# Altium PCB JadePlus_v0.3.1_board.PcbDoc (part 2 of 3)
Units mm, origin at the board's own origin, x right, y up, seen from the top; angles counter-clockwise.
Board outline 26 x 60.7 mm, 4 copper layers (Top/Sig1, Layer 1, Layer 2, Bottom Layer), stack 0.975 mm thick; 120 components, 82 nets, 471 pads, 1359 vias.
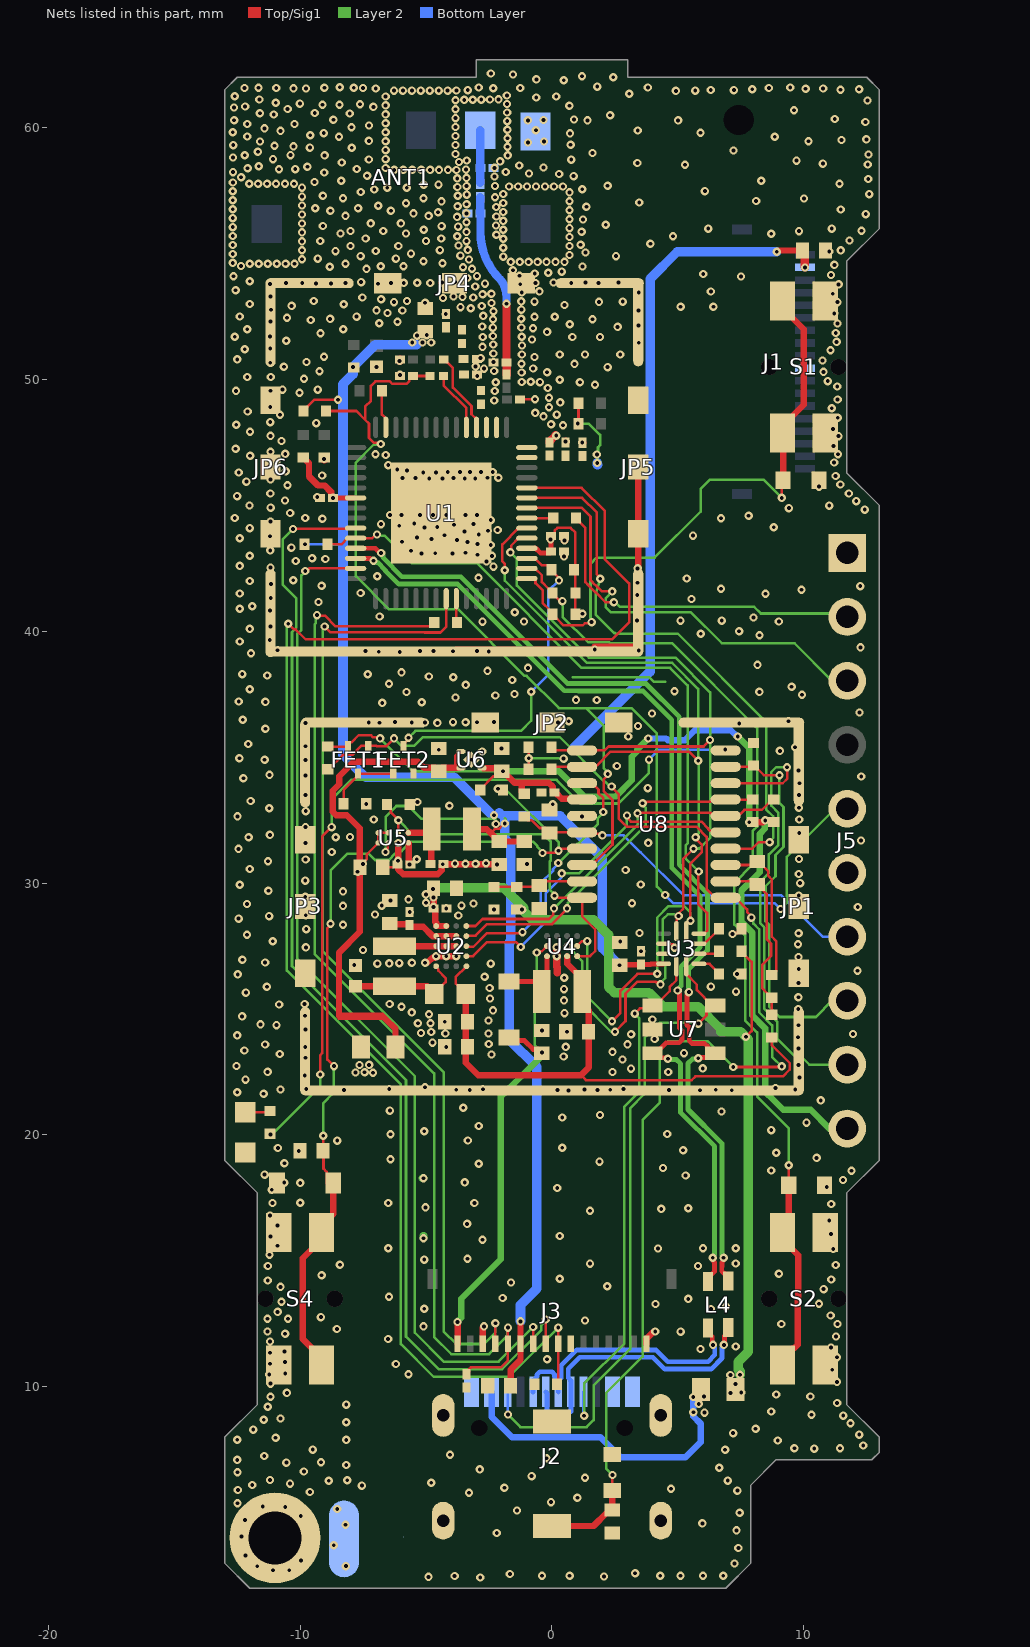
[diagram p4: the nets of this part, all layers, seen from the top]

## Via types
v1: diameter 0.33, hole 0.152, Top/Sig1 to Bottom Layer, tented both sides, 1358 vias
v2: diameter 0.33/0/0/0.33 (per signal layer), hole 0.152, Top/Sig1 to Bottom Layer, tented both sides, 1 vias

## Nets (pads, with @x,y where several pads share a name; then routed paths per layer and width w, separated by ;. In a path a pad name is that pad's centre, name@x,y a point inside that pad or via, vN(x,y) a via of type N, cw(c..) or ccw(c..) an arc to the next point about the centre after c; other vN are vias at no path point) (continued)
GND: ANT1.2 C1.1 C2.1 C3.1 C4.1 C5.2 C6.2 C7.1 C8.2 C9.2 C10.2 C11.2 C12.2 C13.2 C14.1 C15.1 C16.2 C17.1 C18.1 C19.1 C20.2 C21.1 C22.1 C23.1 C24.1 C25.1 C26.1 C27.1 C28.1 C29.1 C30.1 C31.1 C32.1 C33.1 C34.1 C35.1 C37.2 C38.1 C39.2 C41.1 C42.1 C43.1 C44.1 C45.1 D2.2 D4.1 D5.1 D6.1 D7.1 FET2.2 J1.10 J2.GND J2.SHELL J3.1 J3.14 J5.6 JP1.1 JP1.2 JP1.3 JP2.1 JP2.2 JP2.3 JP3.1 JP3.2 JP3.3 JP4.1 JP4.2 JP4.3 JP5.1 JP5.2 JP5.3 JP6.1 JP6.2 JP6.3 pad.0@-8.259,3.961 pad.0@-11,4 pad.36@0,21.775 pad.36@1.899,53.825 pad.36@3.425,40.751 pad.36@3.425,52.274 pad.36@7.518,36.375 pad.36@9.8,23.335 pad.36@9.8,34.815 pad.36@-3.875,39.2 pad.36@-7.468,36.375 pad.36@-9.8,23.335 pad.36@-9.8,34.765 pad.36@-9.624,53.825 pad.36@-11.175,40.726 pad.36@-11.175,52.249 R5.2 R18.2 R19.2 R21.1 R23.1 R27.1 R33.1 R35.2 S1.2 S2.2 S3.2 S4.2 U1.57 U2.D1 U2.D2 U2.D3 U3.10 U3.11 U4.C2 U4.C3 U5.B2 U6.2 U6.5 U7.2 U8.5 | length 39.8
  Top/Sig1 w0.102: C32.1@-6.72,30.625 -6.296,30.625 -6.176,30.745 C33.1@-6.136,30.745 ; C26.1@-6.45,29.31 v1(-6.41,29.31) ; C33.1@-6.136,30.871 v1(-6.117,30.89) ; v1(-5.65,28.85) C25.1@-5.65,28.86 ; R23.1@-5.65,33.125 -5.55,33.225 v1(-5.347,33.225) ; v1(-4.5,35.3) C34.1@-4.5,35.355 ; C29.1@-4.374,30.72 v1(-4.341,30.753) C29.1@-4.301,30.753 ; C23.1@-4.26,23.5 v1(-4.2,23.5) ; v1(-4.2,29) C19.1@-4.19,29 ; U6.2@-2.78,35.225 v1(-2.775,35.23) ; v1(-2,35.35) C38.1@-2,35.355 ; C4.1@-1.267,49.203 -1.254,49.216 v1(-0.677,49.216) ; C31.1@-1.1,30.745 -1.079,30.766 v1(-0.987,30.766) ; C42.1@-0.1,32.91 -0.1,33.007 v1(0.027,33.135) ; C27.1@0.545,24.1 v1(0.6,24.1) ; v1(1.196,32.654) U8.5@1.196,32.671 ; U7.2@3.985,24.196 v1(3.985,24.585) ; U3.10@4.435,27.596 4.45,27.581 4.797,27.581 4.863,27.515 v1(4.863,27.437) ; v1(7.166,27.981) 7.207,28.022 7.376,28.022 7.525,28.171 R18.2@7.525,28.196 ; v1(7.353,26.396) R21.1@7.525,26.396
  Top/Sig1 w0.254: C17.1@-6.975,50.51 v1(-6.965,50.5) ; C33.1@-6.136,30.745 -6.126,30.754 -6.126,30.878 -6.1,30.905 -6.106,30.911 v1(-6.106,31.594) U5.B2@-6.1,31.6 ; v1(-6.117,30.89) C33.1@-6.116,30.889 ; -6.1,30.545 -5.906,30.351 -4.54,30.351 -4.374,30.517 C29.1@-4.374,30.72 ; v1(-5.038,26.842) -5.024,26.857 -4.929,26.857 -4.742,27.044 -4.656,27.044 v1(-4.6,27.1) v1(-4.2,27.1) v1(-3.8,27.1) ; C29.1@-4.301,30.745 C30.1@-2.1,30.745 -2.104,30.741 v1(-2.179,30.741) ; pad.36@-3.875,39.2 -3.81,39.265 1.665,39.265 1.665,39.279 pad.36@1.7,39.315 ; pad.36@-3.832,39.243 v1(3.443,39.243) ; J3.14@-2.75,11.712 -2.75,12.35 v1(-2.7,12.4) ; v1(-2.511,39.197) pad.36@-2.511,39.2 ; C3.1@-2.32,50.675 v1(-2.32,50.695) ; C4.1@-1.27,49.2 C4.1@-1.267,49.203 ; pad.36@1.7,39.2 v1(1.7,39.279) ; v1@1.7,39.4 3.358,39.4 3.425,39.467 3.425,40.371 3.377,40.418 3.425,40.466 JP5.2@3.425,46.525 ; C21.1@2.685,27.651 2.685,27.663 v1(2.707,27.685) ; v1(3.377,40.425) pad.36@3.381,40.422 ; C22.1@3.535,27.296 v1(3.539,27.3) ; J3.1@3.75,11.712 3.75,11.909 4.041,12.2 v1(4.1,12.2)
  Top/Sig1 w0.305: v1(-6.05,50.733) -6.05,50.781 C9.2@-6.037,50.794 ; C5.2@-6.035,50.141 v1(-6.035,50.185) ; C13.2@-0.1,47.5 -0.1,47.54 0.126,47.766 0.166,47.766 v1(0.171,47.771) v1@0.142,47.8 ; v1(0.184,27.455) U4.C3@0.184,27.1 ; U4.C3@0.2,27.1 v1(0.187,27.1) U4.C3@0.184,27.1 ; 0.204,26.445 0.206,26.448 0.206,26.658 0.184,26.681 U4.C3@0.184,27.1 ; C16.2@0.473,43.143 v1(0.473,42.978) v1@0.478,42.978 ; C37.2@0.475,43.795 0.488,43.795 0.495,43.788 0.495,43.618 v1(0.5,43.613) ; C11.2@0.541,47.495 v1(0.541,47.541) ; v1(1.2,47.499) C10.2@1.208,47.49
  Top/Sig1 w0.381: v1(-9.05,46.85) R5.2@-9.05,46.9
  Layer 2 w0.102: 0.818,38.182 1.255,38.182 1.264,38.174 3.865,38.174 4.039,38 4.5,38
  Layer 2 w0.305: v1@-5.145,18.28 v1(-5.1,18.28) ; v1(-5.1,15.9) v1@-5.1,16
  other v1: -2.847,2.43 -4.903,2.453 2.065,2.469 -3.867,2.487 -0.4,2.5 0.7,2.5 4.3,2.5 5.1,2.5 6,2.5 6.8,2.5 -1.673,2.565 3.3,2.6 -11.081,2.719 -10.435,2.715 -11.703,2.877 -8.184,2.88 7.249,2.987 -9.968,3.098 -12.174,3.306 7.4,3.6 -8.667,3.706 -12.329,4.06 -2.192,4.192 7.324,4.299 -8.2,4.525 5.972,4.577 -12.186,4.717 -9.979,4.871 7.45,4.997 -1.392,5.092 -8.525,5.15 -10.594,5.227 -11.486,5.25 -12.491,5.378 -0.039,5.421 1.008,5.592 -3.292,5.792 -9.615,5.826 7.361,5.878 -12.476,5.903 4.725,5.95 -1.892,5.992 -7.55,6.075 -11.9,6.1 -10.405,6.157 -4.792,6.192 -8.863,6.27 -8.128,6.288 6.98,6.274 -11.2,6.3 1.308,6.392 -0.808,6.452 -12.487,6.61 -9.854,6.64 -2.871,6.721 6.642,6.785 -8.172,6.894 -10.548,6.991 -9.175,7.006 -12.5,7.1 -0.218,7.165 -11.429,7.25 -4.05,7.3 -9.503,7.506 6.876,7.499 9.626,7.563 10.412,7.546 11.437,7.561 12.358,7.669 8.964,7.865 -8.172,7.894 -12.5,7.9 -10.975,7.978 12.2,8.1 7.194,8.161 -11.865,8.299 8.088,8.334 11.853,8.551 -8.172,8.594 -11.448,8.693 -10.784,8.745 11.563,8.856 10.308,8.892 8.706,9.019 -11.285,9.21 -8.172,9.294 11.323,9.36 -11.177,9.609 10.261,9.617 8.908,9.692 -10.529,9.759 -11.18,10.127 11.314,10.198 -11.225,10.487 -5.7,10.5 -10.59,10.529 11.127,10.676 -11.201,10.917 -6.2,10.907 -10.605,10.987 -0.192,11.092 11.32,11.174 -11.199,11.356 -10.628,11.402 5.9,11.5 11.077,11.564 7.3,11.6 -11.2,11.8 -6.508,11.902 11.279,12.001 -10.596,12.109 -11.3,12.2 5.108,12.192 -8.543,12.298 -5.1,12.4 9.108,12.492 11.338,12.493 1.307,12.632 -11.3,12.7 -10.48,12.701 -9.179,12.768 11.065,12.836 -10.895,12.977 -5.071,13.1 6.308,13.092 6.908,13.192 4.108,13.292 10.6,13.3 -10.745,13.376 5.408,13.492 -1.96,13.526 -6.472,13.575 10.787,13.879 -10.783,13.968 2.191,13.994 -1.63,14.141 -11.289,14.219 11.091,14.26 0.308,14.292 -9.149,14.429 9.008,14.492 -11.282,14.796 5.8,14.8 -8.424,14.848 11.271,14.839 1.508,14.892 7.3,14.9 -5.075,15.05 -3.355,15.086 -11.222,15.246 11.167,15.473 -6.5,15.5 4.208,15.492 6,15.5 7.3,15.5 -10.9,15.6 -2.761,15.84 -11.18,15.969 0.308,15.992 11.078,16.074 -10.9,16.4 -3.371,16.471 11.008,16.61 -11.2,16.8 1.508,16.992 4.34,17.068 5.408,17.092 -5.025,17.125 11.087,17.258 -11.1,17.3 -9.995,17.31 -6.5,17.3 -3.081,17.303 -11.13,17.828 0.208,17.892 10.914,17.939 -10,18.1 -10.633,18.108 -3.464,18.119 11.557,18.211 5.308,18.392 -11.413,18.425 11.895,18.582 8.708,18.592 4.408,18.692 -2.911,18.858 -10.628,18.881 1.883,18.942 -6.413,19.036 10.508,19.092 8.908,19.292 -10.055,19.37 5.208,19.392 -10.885,19.482 0.408,19.492 -8.53,19.777 -3.34,19.783 -6.412,20.032 4.576,20.037 -5.075,20.15 8.708,20.192 -2.906,20.357 10.108,20.492 0.408,20.692 1.908,20.792 6.731,20.934 -6.438,20.966 -3.526,21.08 10.675,21.375 -11.452,21.638 -12.5,21.7 -8.259,21.788 -3.268,21.785 0.217,21.783 0.657,21.77 1.81,21.79 4.647,21.783 5.871,21.777 7.141,21.777 -10.784,21.804 -3.8,21.8 -2.745,21.814 1.284,21.806 2.313,21.796 6.5,21.8 9.657,21.807 -9.758,21.83 -6.461,21.824 2.835,21.822 8.872,21.864 -5.043,21.895 -12.169,22.198 9.823,22.281 -9.82,22.369 2.4,22.5 -11.292,22.508 4.62,22.503 3.137,22.637 5.989,22.647 -12.528,22.738 9.788,22.774 2.8,23 -9.784,23.065 0.463,23.114 -2.4,23.2 -10.813,23.217 5.241,23.252 2.4,23.3 -12.216,23.357 9.784,23.43 -9.8,23.497 0.543,23.499 -11.393,23.595 -2.512,23.616 3,23.6 -4.743,23.667 4.075,23.811 9.766,23.88 -12.498,23.956 3.143,24 11.956,24.007 -5.204,24.049 -4.234,24.03 -2.519,24.031 -4.797,24.092 -0.4,24.155 -9.791,24.195 9.794,24.355 -10.937,24.364 -11.576,24.393 -5.326,24.441 -4.822,24.436 -4.26,24.5 -2.519,24.546 -12.304,24.711 -9.807,24.738 -4.883,24.797 0.5,24.841 -5.568,24.871 -2.343,24.95 9.778,25.004 -5.973,25.095 -10.837,25.186 -9.823,25.199 -6.446,25.206 0.477,25.345 -2.461,25.424 9.784,25.469 -12.155,25.654 7.308,25.692 0.477,25.792 -2.475,25.839 -11.322,25.889 6.308,25.892 9.788,26.041 0.486,26.246 -2.674,26.284 -12.48,26.38 12.131,26.523 9.798,26.586 -7.852,26.755 -6.934,26.804 -6.462,26.817 -2.435,26.805 -6.066,26.824 -5.564,26.837 -11.393,26.853 -12.297,26.961 9.791,27.071 -7.505,27.345 -9.775,27.45 9.767,27.573 -11.091,27.692 -12.115,27.951 3.475,28.025 9.794,28.015 -9.758,28.175 -8.3,28.35 -12.445,28.591 -11.233,28.691 -3.718,28.719 -9.778,28.727 -7.028,28.758 -2.3,28.95 12.145,29.052 -8.3,29.1 -6.762,29.107 -3.597,29.108 -12.108,29.171 -3.117,29.193 3.175,29.2 -5.697,29.358 -9.801,29.462 9.801,29.513 -8.3,29.675 -11.263,29.696 -12.398,29.939 3.525,29.95 9.854,30.002 -9.796,30.103 9.801,30.366 2.925,30.525 -12,30.565 -3.855,30.775 -3.438,30.774 -3.033,30.772 -2.619,30.79 -11.274,30.873 -9.783,30.944 9.808,30.959 -8.748,31.241 -12.451,31.363 -9.786,31.593 3.825,31.6 12.271,31.693 -12.048,31.825 -8.589,31.824 -8.024,31.832 -11.203,31.919 9.821,31.996 -9.79,32.226 -7.081,32.528 9.821,32.531 -12.486,32.652 -9.778,32.862 -11.227,32.977 9.804,32.996 -4.075,33.075 -7.375,33.15 -11.967,33.26 -9.791,33.495 9.811,33.504 3.8,33.775 9.831,33.969 -12.256,34.169 12.278,34.237 -9.791,34.274 -11.215,34.302 9.794,34.481 2.575,34.65 -9.788,34.887 -11.41,34.899 -3.2,34.9 -12.415,34.964 9.049,35.255 9.655,35.398 -9.788,35.441 -12.061,35.53 3.025,35.825 -11.381,36.134 3.412,36.242 7.437,36.341 -9.794,36.36 -6.849,36.369 -4.552,36.365 -7.277,36.387 -5.568,36.382 -5.047,36.378 -3.43,36.391 -2.98,36.391 0.24,36.378 -6.239,36.4 -3.929,36.396 -2.299,36.4 0.664,36.431 9.392,36.428 -12.283,36.487 3.97,36.741 12.208,36.78 -6.744,37.16 -11.381,37.198 -5.172,37.184 -12.439,37.216 0.95,37.281 1.775,37.272 -3.83,37.376 -2.248,37.452 9.929,37.485 -1.486,37.514 -5.776,37.591 8.233,37.596 4.863,37.621 -12,37.7 9.516,37.798 -3.427,37.874 -6.475,37.922 -1.578,38.07 -3.921,38.181 -4.889,38.209 -11.31,38.245 -12.3,38.3 -7.314,38.296 -5.977,38.372 -2.565,38.43 -0.95,38.55 8.16,38.668 -11.954,39.127 -6.043,39.186 -6.88,39.192 -3.936,39.21 -7.412,39.216 -5.237,39.223 -4.708,39.216 -2.972,39.221 -10.896,39.25 12.25,39.365 -12.4,39.6 -11.209,39.662 8.239,39.845 5.909,39.905 7.43,40.002 -12,40.1 -11.181,40.199 -2.763,40.387 -1.112,40.388 9.008,40.392 5.1,40.425 6.74,40.425 8.003,40.549 -6.846,40.592 -1.482,40.758 -11.199,40.825 -12.4,40.9 -11.9,41 -9.271,41.168 5.538,41.286 -11.167,41.328 3.389,41.447 -12.4,41.5 8.482,41.493 -7.6,41.525 9.905,41.653 6.708,41.692 12.243,41.796 -9.147,41.808 -11.162,41.886 3.395,41.93 -12,42 -10.273,42.028 5.35,42.1 -2.918,42.131 -6.941,42.188 3.4,42.5 -11.178,42.53 -2.324,42.571 -12.4,42.6 -10.173,42.794 -2.602,42.776 -9,42.875 -9.525,42.9 -2.385,42.999 -12,43 -2.956,43.04 -5.184,43.098 -3.957,43.093 -4.635,43.104 -3.441,43.12 -5.598,43.199 -11.188,43.215 -10.35,43.325 -2.429,43.429 -2.959,43.47 -3.353,43.553 -5.958,43.559 -3.766,43.625 -4.784,43.666 -12.4,43.7 -5.357,43.732 -11.196,43.776 5.6,43.8 -4.263,43.815 -2.909,43.842 -3.48,43.967 -2.548,43.994 -2.159,44.022 -12,44.1 -5.059,44.129 8.804,44.136 -4.558,44.146 -6.063,44.193 -3.893,44.234 -6.791,44.259 -3.121,44.264 -5.473,44.284 -11.181,44.362 -2.432,44.416 -9.119,44.47 6.708,44.492 -12.6,44.5 -9.8,44.5 7.808,44.592 -6.432,44.62 -5.978,44.62 -5.244,44.62 -4.723,44.62 -4.196,44.62 -3.438,44.62 -2.978,44.62 -10.4,44.7 12.42,44.834 9.408,44.892 -11.173,44.912 -12.01,45.001 11.008,44.992 12.082,45.172 -10.6,45.2 -9.32,45.338 -12.505,45.369 -11.183,45.473 11.789,45.477 10.603,45.746 -10.5,45.8 11.45,45.83 -12.137,45.945 -11.178,46.031 -4.876,46.068 -4.354,46.068 -3.466,46.068 -3.046,46.068 -5.932,46.091 -5.415,46.089 -3.906,46.085 -2.56,46.099 -2.129,46.099 11.262,46.168 -9.129,46.186 -12.44,46.31 -5.111,46.312 -4.605,46.305 -4.142,46.328 -3.657,46.328 -3.26,46.328 -2.821,46.328 -2.354,46.328 -10.574,46.357 -5.763,46.389 -6.148,46.434 -11.188,46.555 -6.5,46.6 11.203,46.703 -11.988,46.976 -6.6,47 -7.007,47.035 11.357,47.035 -10.59,47.048 -11.181,47.133 -12.564,47.248 11.176,47.366 -10.741,47.559 -11.181,47.764 11.377,47.751 -11.991,47.93 11.157,48.034 -12.536,48.202 0.44,48.182 -0.035,48.225 -9.363,48.268 -11.186,48.309 11.349,48.483 -0.337,48.537 -10.8,48.6 0.186,48.606 -0.668,48.676 -12.087,48.728 11.11,48.863 -11.19,48.907 -0.122,48.9 0.327,49.092 -2.292,49.17 11.344,49.21 -0.121,49.278 -10.025,49.475 -12.552,49.549 -2.274,49.541 -11.181,49.557 -10.7,49.6 -9.3,49.6 -0.166,49.664 11.33,49.721 1.708,49.792 -2.235,49.894 -1.201,49.903 -0.481,49.896 1.108,49.892 -0.847,49.914 10.953,49.936 0.308,49.992 -9.848,50.031 -12.1,50.1 -11.167,50.1 -2.971,50.145 -1.207,50.279 -0.192,50.292 10.78,50.304 -9.234,50.332 -2.298,50.337 -2.704,50.433 -0.75,50.435 2.208,50.492 -10.648,50.504 -3.033,50.522 -1.209,50.628 0.895,50.622 -11.187,50.669 -9.749,50.693 10.744,50.758 -12.5,50.8 -2.833,50.848 -0.692,50.892 -9.055,50.904 -1.196,50.993 0.308,50.992 1.308,50.992 2.708,50.992 -2.327,51.035 11.062,51.16 -12.2,51.2 -11.187,51.234 -2.763,51.296 -1.188,51.355 -2.335,51.391 3.442,51.459 11.304,51.497 -10.553,51.538 -0.792,51.592 -12.6,51.7 -11.192,51.71 -2.752,51.692 -1.2,51.7 0.808,51.692 1.908,51.692 -2.348,51.73 -9.195,51.837 11.269,51.851 -0.192,51.892 -12.1,52 -8.288,51.995 -0.753,52.039 -2.347,52.06 -1.215,52.063 2.608,52.092 -2.772,52.108 3.438,52.141 0.708,52.192 -6.857,52.233 11.34,52.223 -6.132,52.295 -11.181,52.301 -9.583,52.367 -2.341,52.392 1.608,52.392 -8.811,52.409 -1.219,52.411 -10.525,52.452 -7.759,52.498 -0.692,52.492 0.108,52.492 -12.4,52.5 -2.729,52.527 -4.217,52.598 -6.532,52.642 11.211,52.629 -2.327,52.714 -6.967,52.747 -5.942,52.739 3.429,52.739 -11.156,52.77 -1.217,52.777 -3.228,52.831 -3.636,52.875 5.108,52.892 6.408,52.892 -10.338,52.925 -2.786,52.92 0.496,52.959 -12,53 -8.271,52.992 -5.038,53.048 -2.4,53.041 -6.275,53.075 11.334,53.073 -1.223,53.103 -0.692,53.092 1.864,53.083 2.808,53.092 -9.463,53.119 -5.759,53.118 -6.787,53.186 -4.326,53.235 -7.531,53.26 -3.128,53.257 -3.555,53.281 -11.176,53.302 -3.908,53.296 -2.755,53.385 -2.407,53.407 11.146,53.405 -1.2,53.454 3.442,53.452 -0.5,53.5 6.308,53.492 -12.563,53.548 -3.046,53.697 -1.264,53.783 11.382,53.779 -11.2,53.8 -9.375,53.817 -6.91,53.803 -2.658,53.809 -10.559,53.834 -9.915,53.831 -8.77,53.82 -8.201,53.84 -6.395,53.837 -5.886,53.84 -4.833,53.834 -0.654,53.832 0.761,53.832 1.842,53.832 -7.58,53.868 -5.354,53.845 -4.355,53.848 0.057,53.85 1.325,53.853 2.64,53.85 -3.857,53.873 -12,53.9 -3.37,54.029 7.508,54.092 -12.65,54.1 -2.975,54.105 -1.294,54.121 11.077,54.153 6.008,54.192 -0.684,54.209 -0.148,54.238 0.39,54.286 -1.555,54.342 -7.369,54.393 -3.177,54.399 -8.824,54.479 -3.532,54.457 -12.35,54.505 -6.8,54.5 -5.9,54.5 1.208,54.492 11.213,54.554 -12,54.597 -11.644,54.597 -11.289,54.597 -10.933,54.597 -10.578,54.597 -10.223,54.597 -8.2,54.6 -12.675,54.632 -4.347,54.621 -1.637,54.674 -1.282,54.674 -0.927,54.674 -0.571,54.674 -0.216,54.674 0.14,54.674 0.495,54.674 -5.1,54.7 -9.929,54.776 -3.297,54.768 -9.3,54.8 -6.2,54.8 -1.935,54.879 -7.6,54.9 2.54,54.899 -3.639,54.922 0.693,54.946 -12.675,54.987 -5.6,55 1.332,55.046 11.011,55.085 -8.6,55.1 -7,55.107 -9.929,55.132 -4.452,55.137 11.465,55.129 -3.348,55.149 -1.935,55.235 -8,55.3 -6.1,55.3 0.693,55.301 -12.675,55.342 -3.714,55.326 1.138,55.355 3.908,55.392 -9.929,55.487 -9.2,55.5 -5,55.5 -3.393,55.496 11.816,55.519 -1.935,55.59 -7.4,55.6 -4.4,55.6 0.693,55.657 -12.675,55.698 -3.763,55.687 4.808,55.692 -2.21,55.747 -8.4,55.8 -5.8,55.8 8.708,55.792 -9.929,55.843 -3.397,55.864 1.178,55.868 -8,55.9 -6.7,55.9 9.808,55.892 12.293,55.909 -5.095,55.948 -1.935,55.945 6.208,55.992 11.108,55.992 0.693,56.012 -12.675,56.053 -3.728,56.072 -9.1,56.1 -4.384,56.091 -2.225,56.12 2.135,56.144 -9.929,56.198 -7.2,56.2 -6,56.2 -3.393,56.249 -1.935,56.301 1.233,56.355 0.693,56.368 -12.675,56.409 -3.766,56.46 -2.208,56.474 -8.2,56.5 -4.9,56.5 -9.929,56.553 12.459,56.567 -5.5,56.6 -3.4,56.6 -4.521,56.644 -1.935,56.656 -8.8,56.7 -6.4,56.7 0.693,56.723 -12.675,56.764 11.466,56.752 -9.4,56.8 -7.7,56.8 -2.216,56.849 1.365,56.863 -3.748,56.882 -9.929,56.909 -6.9,56.9 -3.389,56.963 -5.8,57 -1.935,57.012 3.462,57.029 -4.389,57.077 0.693,57.078 8.108,57.092 -12.675,57.12 10.008,57.192 -8.3,57.2 -5.1,57.2 -2.265,57.237 -9.929,57.264 -9.1,57.3 -3.742,57.3 -3.387,57.343 -1.935,57.367 12.596,57.362 -7.593,57.445 0.693,57.434 -12.675,57.475 6.072,57.481 -7.061,57.546 1.203,57.556 -9.929,57.62 -6.539,57.614 -5.77,57.614 -3.757,57.642 -3.389,57.679 -1.702,57.665 -1.346,57.665 -0.991,57.665 -0.635,57.665 -0.28,57.665 0.075,57.665 0.431,57.665 -2.263,57.688 2.208,57.692 -5.095,57.735 -4.505,57.74 -12.024,57.773 -11.669,57.773 -11.313,57.773 -10.958,57.773 -10.602,57.773 -10.247,57.773 11.42,57.776 -12.672,57.827 -9.428,57.843 -8.366,57.892 8.308,57.892 12.562,57.962 -3.761,57.988 -3.397,58.009 -12.343,58.034 -2.28,58.066 0.858,58.077 -7.34,58.094 0.284,58.163 -0.912,58.181 -12.667,58.236 -9.043,58.219 -1.835,58.242 -6.263,58.325 -5.907,58.325 -5.552,58.325 -5.196,58.325 -4.841,58.325 -4.485,58.325 -4.13,58.325 -3.799,58.318 -3.412,58.339 -10.842,58.352 -10.195,58.355 -7.754,58.358 -12.088,58.39 -6.605,58.398 -2.281,58.405 -0.334,58.418 -9.716,58.452 -11.645,58.468 -1.3,58.5 5.279,58.532 12.537,58.537 10.755,58.572 -8.347,58.617 3.389,58.596 -3.695,58.639 -2.06,58.664 9.708,58.692 -3.385,58.697 -7.272,58.737 0.764,58.732 -11.078,58.753 -6.605,58.754 -12.668,58.817 -12.198,58.905 -10.386,58.911 -9.03,58.902 -1.759,58.901 12.566,58.937 -3.829,58.958 1.608,58.992 -11.68,59.044 7.208,59.092 -6.605,59.109 -9.615,59.209 -7.952,59.206 -1.764,59.242 -10.263,59.258 -11.017,59.287 -12.656,59.309 -3.829,59.314 0.74,59.322 -0.955,59.416 -11.596,59.452 -0.32,59.456 -7.272,59.478 -6.605,59.464 10.183,59.462 11.494,59.509 12.484,59.536 -1.768,59.582 -12.104,59.653 -8.457,59.64 8.847,59.638 -3.829,59.669 -9.6,59.7 -9.065,59.785 0.715,59.775 5.9,59.8 -12.677,59.817 -6.605,59.82 -10.78,59.876 -0.639,59.897 3.408,59.892 -1.773,59.922 -11.415,59.973 -7.962,60.018 -3.829,60.025 -7.269,60.089 -12.101,60.145 -10.224,60.151 -6.605,60.175 12.445,60.224 -1.777,60.262 -12.624,60.295 -0.959,60.292 1.408,60.292 5.008,60.292 -8.683,60.319 -0.334,60.303 0.876,60.326 11.226,60.348 -3.829,60.38 2.308,60.492 -11.049,60.523 -6.605,60.531 -11.599,60.575 -8.033,60.562 -9.424,60.585 -1.782,60.602 9.608,60.692 -10.499,60.743 -3.829,60.736 -12.625,60.8 -7.094,60.827 -12.185,60.84 0.691,60.872 -6.605,60.886 -9.117,60.912 -8.437,60.912 -7.625,60.931 -10.013,60.957 -1.786,60.942 -10.968,60.989 12.528,61.082 -3.829,61.091 -3.487,61.106 -11.622,61.122 -3.147,61.111 -2.807,61.115 -2.467,61.12 -2.126,61.125 -0.625,61.199 -12.598,61.251 -6.605,61.242 0.169,61.238 -1.791,61.282 3.065,61.35 4.918,61.462 -6.276,61.472 -5.921,61.472 -5.566,61.472 -5.21,61.472 -4.855,61.472 -4.499,61.472 -4.144,61.472 -3.796,61.476 5.688,61.472 -3.344,61.493 6.307,61.496 7.223,61.491 11.455,61.511 7.955,61.53 12.196,61.525 -10.268,61.563 -9.767,61.56 -6.999,61.557 10.07,61.55 10.768,61.554 -12.21,61.578 -11.653,61.587 -10.953,61.575 -9.041,61.587 -7.874,61.587 -7.504,61.575 -2.334,61.569 -1.259,61.574 8.613,61.579 -8.428,61.61 -2.908,61.595 3.806,61.593 9.461,61.593 1.798,61.632 0.467,61.886 -0.62,61.92 2.431,62.003 1.188,62.047 -1.551,62.116 -2.426,62.152
GPIO0: C5.1 J5.5 L5.1 R12.1 U8.8 | length 51.5
  Top/Sig1 w0.102: R12.1@-8.975,48.75 -7.765,48.75 -7.418,48.403 ; v1(-6.8,47.438) -6.844,47.482 -7.064,47.482 -7.268,47.686 -7.268,48.253 -7.418,48.403 ; L5.1@-4.847,50.142 L5.1@-4.847,50.142 C5.1@-5.515,50.141 -5.555,50.141 -5.664,50.032 -5.664,49.936 -5.772,49.828 -6.343,49.828 -6.442,49.927 -7.013,49.927 -7.196,49.745 -7.196,49.153 -7.418,48.932 -7.418,48.403 ; U8.8@1.196,30.721 1.596,30.721 2.403,31.528 2.403,33.299 2.05,33.652 2.05,34.114 2.216,34.279 v1(2.216,34.341)
  Layer 2 w0.102: v1(-6.8,47.438) -6.827,47.411 -7.08,47.411 -7.791,46.7 -7.791,42.191 -6.47,40.87 -3.72,40.87 -1.083,38.232 -1.008,38.232 0.27,36.954 1.35,36.954 ; v1(2.216,34.341) 2.216,34.403 2.05,34.568 2.05,36.254 1.35,36.954 ; v1(4.495,29.534) 4.167,29.862 4.167,35.935 3.149,36.954 1.35,36.954 ; v1(9.075,28.975) 9.324,29.224 9.324,31.049 11.23,32.955 J5.5@11.475,32.955
  Bottom Layer w0.102: v1(4.495,29.534) 4.829,29.2 8.85,29.2 v1(9.075,28.975)
LCD_CS: J3.10 U1.27 | length 40.8
  Top/Sig1 w0.102: v1(-9.8,42.4) -9.738,42.4 -9.638,42.5 U1.27@-7.8,42.5 ; J3.10@-0.75,11.712 v1(-0.75,12.375)
  Layer 2 w0.102: v1(-9.8,42.4) -9.8,42.382 -9.956,42.226 -9.956,40.054 -10.123,39.888 -10.123,27.008 -5.45,22.335 -5.45,12.15 -4.3,11 -2.125,11 v1(-0.75,12.375)
LCD_DC: J3.13 U1.36 | length 39.8
  Top/Sig1 w0.102: v1(-9.029,40.191) -8.798,39.96 -5.06,39.96 -5.054,39.954 -4.43,39.954 -4.197,40.187 U1.36@-4.197,41.297 ; J3.13@-2.25,11.712 v1(-2.25,12.525)
  Layer 2 w0.102: v1(-9.029,40.191) -9.029,40.129 -9.11,40.048 -9.11,34.152 -9.11,27.31 -4.3,22.5 -4.3,12.2 -3.8,11.7 -2.7,11.7 -2.25,12.15 v1(-2.25,12.525)
LCD_RST: J3.8 R33.2 U1.52 | length 62.7
  Top/Sig1 w0.102: v1(-10.476,40.3) -10.472,40.3 -10.25,40.078 -10.178,40.078 -9.779,39.679 2.379,39.679 3.059,40.359 3.059,41.902 2.1,42.861 2.1,44.775 1.175,45.7 U1.52@-1,45.7 ; R33.2@0.2,10.1 0.25,10.15 J3.8@0.25,11.712 v1(0.25,12.35)
  Layer 2 w0.102: v1(-10.476,40.3) -10.52,40.256 -10.52,40.165 -10.529,40.156 -10.529,26.529 -6,22 -6,11.7 -4.7,10.4 -1.7,10.4 v1(0.25,12.35)
LCD_SCK: C39.1 J3.12 R24.1 | length 42.7
  Top/Sig1 w0.102: v1(-9.332,40.645) -9.311,40.625 -9.014,40.625 -8.589,40.2 -4.675,40.2 R24.1@-4.675,40.35 ; C39.1@-3.4,10.5 -3.291,10.609 -3.291,10.7 -3.216,10.775 -2.025,10.775 -1.75,11.05 J3.12@-1.75,11.712 v1(-1.75,12.35)
  Layer 2 w0.102: v1(-9.332,40.645) -9.375,40.601 -9.375,40.331 -9.429,40.277 -9.429,27.188 -4.683,22.442 -4.683,11.983 -4,11.3 -2.5,11.3 -1.768,12.032 -1.768,12.332 v1(-1.75,12.35)
LCD_TE: J3.7
MCU_NRST: C42.2 J5.7 R29.2 U8.6 | length 14.6
  Top/Sig1 w0.102: R29.2@-1.1,32.65 -0.956,32.506 -0.807,32.506 -0.492,32.191 -0.27,32.191 -0.1,32.021 U8.6@1.196,32.021 1.253,31.964 1.936,31.964 v1(2,31.9)
  Bottom Layer w0.102: v1(2,31.9) 2.841,31.9 3.516,31.225 3.525,31.225 5.225,29.525 9.099,29.525 10.749,27.875 J5.7@11.475,27.875
NetANT1_1: ANT1.1 C1.2 R1.1 | length 2
  Bottom Layer w0.33: R1.1@-2.85,57.81 C1.2@-2.85,58.328 ; ANT1.1@-2.85,59.9 -2.845,59.895 C1.2@-2.845,58.4
NetC2_2: C2.2 C3.2 R1.2 R2.1 | length 7.3
  Top/Sig1 w0.33: v2(-1.809,53.012) -1.809,50.68 -1.804,50.675 C3.2@-1.8,50.675 R2.1@-1.8,50.195
  Bottom Layer w0.33: C2.2@-2.851,56.611 R1.2@-2.851,57.239 ; C2.2@-2.84,56.6 -2.84,55.835 ccw(c-0.249,55.835) -2.081,54.003 cw(c-2.66,53.424) -1.904,53.737 cw(c-3.054,53.261) -1.809,53.262 -1.809,53.26 v2(-1.809,53.012)
NetC20_1: C20.1 L1.2 R22.2 U2.E1 | length 4.7
  Top/Sig1 w0.102: R22.2@-4.675,25.625 -4.225,26.075 -4.225,26.233 -4.516,26.524 -4.516,26.582 -4.6,26.665 U2.E1@-4.6,26.7
  Top/Sig1 w0.254: C20.1@-7.8,25.9 L1.2@-6.25,25.9 -4.95,25.9 -4.675,25.625 R22.2@-4.675,25.6
NetC25_2: C25.2 C26.2 U2.B1 U2.B2 U2.B3 | length 2.9
  Top/Sig1 w0.254: C26.2@-6.45,28.4 -6.42,28.37 -5.68,28.37 C25.2@-5.65,28.34 -5.65,28.3 -5.617,28.267 -5.109,28.267 -4.742,27.9 U2.B1@-4.6,27.9 U2.B2@-4.2,27.9 U2.B3@-3.8,27.9
NetC29_2: C29.2 L3.2 U5.A1 | length 2.4
  Top/Sig1 w0.254: U5.A1@-5.7,32 -4.92,32 L3.2@-4.798,32.122 ; C29.2@-4.821,30.753 -4.798,30.776 L3.2@-4.798,32.122 ; L3.2@-4.775,32.146 L3.2@-4.798,32.122
NetD1_1: D1.1 L2.2 U4.D3 | length 3
  Top/Sig1 w0.203: D1.1@-1.7,26.1 -0.648,26.1 -0.4,25.852 L2.2@-0.4,25.7 -0.2,25.9 U4.D3@-0.2,27.1
NetD2_1: D2.1 R28.1 | length 1
  Top/Sig1 w0.102: D2.1@-12.179,20.905 -11.245,20.905 R28.1@-11.2,20.95
NetFB2_2: FB2.2 J2.VBUS | length 12.1
  Bottom Layer w0.254: J2.VBUS@-2.4,9.8 -2.4,8.813 -1.586,8 1.926,8 2.726,7.2 5.3,7.2 5.9,7.8 5.9,8.544 5.612,8.832 v1(5.612,9.597)
  other v1: 5.615,8.989 6.056,8.974 5.828,9.322 6.036,9.609
NetFET1_3: FET1.3 FET2.1 R19.1 | length 2.8
  Top/Sig1 w0.102: R19.1@-8.275,33.15 -8.275,33.7 -7.7,34.275 FET1.3@-7.7,34.35 FET2.1@-6.3,34.35
NetL1_1: L1.1 U2.C1 U2.C2 U2.C3 | length 2.5
  Top/Sig1 w0.254: L1.1@-6.25,27.5 U2.C1@-4.6,27.5 U2.C2@-4.2,27.5 U2.C3@-3.8,27.5
NetL5_2: L5.2 U1.5 | length 2.4
  Top/Sig1 w0.102: L5.2@-4.307,50.142 -4.307,49.769 -3.4,48.862 U1.5@-3.4,48.1
NetL6_1: L6.1 U1.4 | length 3.3
  Top/Sig1 w0.102: L6.1@-4.3,50.8 -4.191,50.691 -4.161,50.691 -3.932,50.463 -3.932,49.682 -3.197,48.946 -3.197,48.622 -3,48.425 U1.4@-3,48.1
NetL7_1: L7.1 U1.2 U1.3
NetR3_2: R3.2 U1.13 | length 1.5
  Top/Sig1 w0.102: R3.2@-6.75,49.55 -6.752,49.548 -6.752,48.604 -6.6,48.452 U1.13@-6.6,48.1
NetR6_2: R6.2 U1.49 | length 1.1
  Top/Sig1 w0.102: U1.49@-1,44.5 R6.2@0.05,44.5
NetR16_2: R16.2 U3.4 | length 0.8
  Top/Sig1 w0.102: U3.4@5.835,27.196 6.535,27.196 R16.2@6.635,27.296
NetR18_1: R18.1 U3.5 | length 1.1
  Top/Sig1 w0.102: U3.5@5.835,27.596 6.06,27.596 6.635,28.171 R18.1@6.635,28.196
NetR21_2: R21.2 U3.3 | length 1
  Top/Sig1 w0.102: U3.3@5.835,26.796 6.26,26.796 6.635,26.421 R21.2@6.635,26.396
NetR24_2: R24.2 U1.37 | length 1
  Top/Sig1 w0.102: U1.37@-3.8,41.3 -3.8,40.375 R24.2@-3.775,40.35
OTG_EN: U2.D4 U8.15 | length 14.1
  Top/Sig1 w0.102: U2.D4@-3.4,27.1 -3.132,27.1 -2.576,27.655 -1.43,27.655 v1(-1.243,27.468) ; v1@2.975,32.686 2.975,32.601 3.129,32.447 5.929,32.447 6.203,32.172 6.203,32.157 6.282,32.078 6.839,32.078 U8.15@6.896,32.021
  Layer 2 w0.102: v1(0.387,30.388) 1.076,30.388 2.975,32.287 v1(2.975,32.686)
  Bottom Layer w0.102: v1(-1.243,27.468) -0.241,28.47 -0.241,29.608 0.375,30.224 0.375,30.376 v1(0.387,30.388) v1@0.401,30.375
OTG_STAT: U2.C4 U8.3 | length 10.3
  Top/Sig1 w0.102: U2.C4@-3.4,27.5 -3.375,27.475 -3.285,27.475 -3.282,27.473 -3.127,27.473 -2.592,28.008 -1.349,28.008 -1.344,28.013 -1.219,28.013 v1(-1.175,28.057) ; U8.3@1.196,33.971 1.596,33.971 1.847,33.719 1.847,33.568 2.037,33.378 v1(2.037,32.823)
  Layer 2 w0.102: v1(0.251,30.798) 1.011,31.558 1.03,31.558 1.825,32.354 1.825,32.586 2.037,32.798 v1(2.037,32.823)
  Bottom Layer w0.102: v1(-1.175,28.057) -0.45,28.782 -0.45,30 0.039,30.489 0.039,30.561 0.251,30.773 v1(0.251,30.798)
PD_CC1: J2.A5 U3.1 U7.1 | length 20.8
  Top/Sig1 w0.102: v1(3.283,24.82) 3.492,25.029 3.867,25.029 U7.1@3.985,25.146 4.11,25.146 4.672,25.708 4.672,25.881 4.935,26.144 U3.1@4.935,26.696
  Layer 2 w0.102: v1(1.275,8.85) 1.275,10.123 2.875,11.723 2.875,21.123 3.461,21.709 3.461,24.642 v1(3.283,24.82)
  Bottom Layer w0.102: J2.A5@1.25,9.8 1.25,8.875 v1(1.275,8.85)
PD_CC2: J2.B5 U3.2 U7.6 | length 26.1
  Top/Sig1 w0.102: U3.2@5.335,26.696 5.335,26.386 5.754,25.967 5.754,25.752 U7.6@6.36,25.146 ; v1(5.812,24.422) 6.136,24.746 6.136,24.922 U7.6@6.36,25.146 ; U7.6@6.485,25.146 U7.6@6.36,25.146
  Layer 2 w0.102: v1(-1.75,8.9) -1.25,8.4 1.375,8.4 1.65,8.675 1.65,10.05 3.1,11.5 3.1,21.061 3.682,21.643 3.682,23.868 4.271,24.456 5.778,24.456 v1(5.812,24.422)
  Bottom Layer w0.102: v1(-1.75,8.9) J2.B5@-1.75,9.8
PMS_SCL: R15.1 U2.A4 U8.16 | length 14.6
  Top/Sig1 w0.102: U2.A4@-3.4,28.3 -3.037,28.3 -2.76,28.578 -0.127,28.578 0.053,28.757 0.053,28.974 v1(0.077,28.998) v1@0.139,28.998 ; v1(3.398,32.775) 3.413,32.791 6.295,32.791 6.415,32.671 U8.16@6.896,32.671 6.953,32.728 7.434,32.728 7.469,32.764 7.498,32.764 7.643,32.909 8.329,32.909 R15.1@8.607,33.187
  Layer 2 w0.102: v1(0.077,28.998) 3.398,32.319 v1(3.398,32.775)
PMS_SDA: R25.1 U2.B4 U8.17 | length 14.4
  Top/Sig1 w0.102: U2.B4@-3.4,27.9 -3.383,27.917 -3.033,27.917 -2.576,28.374 -0.001,28.374 0.598,28.973 v1(0.598,28.998) ; v1(3.6,33.175) 3.644,33.219 3.754,33.219 3.774,33.239 6.287,33.239 6.312,33.264 6.423,33.264 6.48,33.321 7.971,33.321 R25.1@7.975,33.325
  Layer 2 w0.102: v1(0.598,28.998) 0.629,29.03 0.629,29.213 3.715,32.299 3.715,32.998 3.6,33.113 v1(3.6,33.175)
PWR_BUT: C44.2 D7.2 R31.2 S4.1 U8.7 | length 35.6
  Top/Sig1 w0.102: v1(-9.085,19.972) -9.085,19.388 -9.073,19.375 -9.073,18.661 -8.949,18.538 -8.949,18.074 D7.2@-8.687,17.812 ; v1(-8.793,28.388) -8.793,28.339 -8.918,28.214 -8.918,22.999 -8.66,22.742 v1(-8.66,22.735) ; v1(-0.375,31.2) 0.175,31.2 v1(0.26,31.285) 0.346,31.371 U8.7@1.196,31.371
  Top/Sig1 w0.254: S4.1@-9.15,10.875 -9.15,11.15 -9.9,11.9 -9.9,15.1 -9.15,15.85 -9.15,16.4 -8.687,16.863 D7.2@-8.687,17.812
  Layer 2 w0.102: v1(-9.085,19.972) -9.09,19.977 -9.09,21.257 -8.666,21.681 v1@-8.666,22.73 ; v1(-8.793,28.388) -8.793,30.507 -8.132,31.168 -7.274,31.168 -7.027,30.921 -6.481,30.921 -6.233,31.17 -6.115,31.17 -6.008,31.276 -5.975,31.276 -5.789,31.462 -5.789,31.534 -5.684,31.638 -0.738,31.638 -0.578,31.478 -0.578,31.445 -0.375,31.242 v1(-0.375,31.2) ; v1(-2.15,33.75) -1.863,33.75 0.26,31.627 v1(0.26,31.285)
PWR_OFF_P: U1.51 U8.14 | length 22.5
  Top/Sig1 w0.102: U1.51@-1,45.3 1.198,45.3 1.779,44.719 1.779,42.264 1.917,42.126 v1(1.917,42.091) ; U8.14@6.896,31.371 7.952,31.371 8.206,31.625 v1(8.644,31.625)
  Layer 2 w0.102: v1(1.917,42.091) 1.733,41.488 1.733,40.914 1.733,40.667 2.464,39.936 2.501,39.936 2.533,39.904 4.996,39.904 8.503,36.397 8.503,32.932 8.786,32.648 8.786,31.799 8.644,31.656 v1(8.644,31.625)
SPI_MISO: J3.9 U1.23 | length 44.9
  Top/Sig1 w0.102: v1(-10.283,44.062) -10.263,44.081 -7.819,44.081 U1.23@-7.8,44.1 ; J3.9@-0.25,11.712 v1(-0.25,12.675)
  Layer 2 w0.102: v1(-10.283,44.062) -10.7,43.645 -10.7,41.862 -10.159,41.321 -10.159,40.139 -10.326,39.972 -10.326,26.705 -5.797,22.176 -5.797,11.997 -4.5,10.7 -1.976,10.7 -0.433,12.243 -0.433,12.431 -0.25,12.613 v1(-0.25,12.675)
STU_LED: R28.2 U8.20 | length 32
  Top/Sig1 w0.102: R28.2@-11.2,20.05 v1(-11.175,20.025) ; v1(-9.2,22.4) -9.2,23.175 -9.125,23.25 -9.125,31.85 v1(-8.75,32.225) ; v1(6.882,35.303) 6.882,35.285 U8.20@6.896,35.271
  Layer 2 w0.102: v1(-11.175,20.025) -11.114,20.025 -9.2,21.939 v1(-9.2,22.4) ; v1(-8.75,32.225) -8.75,33.325 -7.974,34.101 0.181,34.101 1.117,33.164 2.647,33.164 3.85,34.368 v1(3.85,34.907)
  Bottom Layer w0.102: v1(3.85,34.907) 4.077,35.134 4.077,35.202 4.178,35.303 v1(6.882,35.303)
SYS_EN: R23.2 U4.A3 U5.B1 U8.10 | length 14.2
  Top/Sig1 w0.102: R23.2@-6.55,33.125 -6.401,32.976 -6.401,32.801 v1(-6.1,32.5) U5.B1@-6.1,32 ; v1(0.1,29.5) 0.162,29.5 0.241,29.421 U8.10@1.196,29.421 1.196,28.687 1.717,28.165 1.717,27.305 1.512,27.1 U4.A3@1,27.1
  Layer 2 w0.102: v1(-6.1,32.5) -5.535,31.935 -0.335,31.935 -0.057,31.657 -0.057,30.892 -0.097,30.852 -0.097,29.752 0.1,29.556 v1(0.1,29.5)
SYS_SCL: R8.1 U1.47 U3.8 U4.B2 U8.1 | length 39.2
  Top/Sig1 w0.102: v1(-1.653,43.136) -1.625,43.164 -1.625,43.4 -1.325,43.7 U1.47@-1,43.7 ; R8.1@-0.025,35.4 0.104,35.271 2.089,35.271 2.246,35.428 6.022,35.428 v1(6.276,35.683) ; v1(2.5,24.1) 2.919,24.519 2.919,25.619 3.388,26.088 4.109,26.088 4.139,26.058 4.17,26.058 4.247,25.982 v1(4.309,25.982) ; U3.8@4.935,28.096 4.95,28.111 v1@4.95,28.557 ; v1(5.029,28.697) 5.072,28.741 5.072,28.846 5.21,28.984 5.21,30.955 v1(5.623,31.367)
  Layer 2 w0.102: v1(-1.653,43.136) -1.392,42.875 -1.392,41.815 1.469,38.953 4.897,38.953 6.276,37.574 v1(6.276,35.683) 6.28,35.679 6.28,31.797 5.859,31.376 5.632,31.376 v1(5.623,31.367) ; v1@0.608,27.497 1.197,26.908 1.197,25.254 2.351,24.1 v1(2.5,24.1) ; v1(4.309,25.982) 4.309,26.044 4.497,26.233 4.497,26.703 4.406,26.794 4.406,28.569 4.597,28.76 4.855,28.76
  other v1: 0.613,27.502
SYS_SDA: R7.1 U1.48 U3.7 U4.A2 U8.2 | length 39.3
  Top/Sig1 w0.102: v1(-1.876,42.426) -1.871,42.431 -1.871,42.677 -1.97,42.776 -1.97,43.455 -1.325,44.1 U1.48@-1,44.1 ; R7.1@-0.025,34.525 0.071,34.621 U8.2@1.196,34.621 1.253,34.678 1.783,34.678 2.33,35.225 5.444,35.225 v1(5.806,34.864) ; U4.A2@1,27.5 1.2,27.7 v1(1.4,27.7) ; v1(2.384,24.516) 2.716,24.848 2.716,25.721 3.395,26.4 4.174,26.4 v1(4.18,26.406) ; v1(5.499,28.511) 5.499,30.779 5.94,31.221 5.94,31.538 5.705,31.773 v1(5.705,31.823)
  Layer 2 w0.102: v1(-1.876,42.426) -1.876,42.011 1.385,38.75 4.775,38.75 5.806,37.719 v1(5.806,34.864) 5.833,34.836 5.833,31.997 5.705,31.868 v1(5.705,31.823) ; v1(1.4,27.7) 1.4,25.5 v1(2.384,24.516) ; v1(4.18,26.406) 4.18,28.63 4.635,29.086 5.242,29.086 5.499,28.829 v1(5.499,28.511)
SYS_SWCLK: J5.8 R27.2 U8.19 | length 15.2
  Top/Sig1 w0.102: U8.19@6.896,34.621 7.946,34.621 R27.2@8,34.675 8.025,34.675 8.414,34.286 v1(9.031,34.286)
  Layer 2 w0.102: v1(9.031,34.286) 9.031,33.183 9.193,33.021 9.193,31.63 ; 9.192,31.63 9.192,31.437 8.875,31.12 8.875,30.275 8.478,29.878 8.478,28.49 8.636,28.332 8.636,25.091 9.04,24.687 10.477,24.687 11.125,25.335 J5.8@11.475,25.335
SYS_SWDIO: J5.9 U8.18 | length 17.9
  Top/Sig1 w0.102: U8.18@6.896,33.971 8.816,33.971 8.818,33.968 9.163,33.968 9.349,34.154 9.349,34.587 v1(9.333,34.603)
  Layer 2 w0.102: 8.989,31.714 8.989,31.521 8.616,31.148 8.616,30.406 8.275,30.065 8.275,28.406 8.433,28.248 8.433,25.007 8.947,24.492 8.947,23.818 9.652,23.113 9.898,23.113 10.216,22.795 J5.9@11.475,22.795 ; 8.989,31.715 8.989,32.793 8.706,33.076 8.706,34.409 8.9,34.603 v1(9.333,34.603)
U0RXD: J5.3 U1.50 | length 17.5
  Top/Sig1 w0.102: U1.50@-1,44.9 -0.989,44.911 1.18,44.911 1.529,44.562 1.529,42.039 1.614,41.954 1.614,41.945 1.8,41.759 1.809,41.759 1.981,41.587 v1@2.391,41.587
  Layer 2 w0.102: v1(2.392,41.588) 2.139,41.318 2.139,41.082 2.139,40.955 2.329,40.766 5.507,40.766 6.744,39.528 9.632,39.528 11.125,38.035 J5.3@11.475,38.035
U0TXD: J5.2 R6.1 | length 13.4
  Top/Sig1 w0.102: R6.1@0.95,44.5 0.95,44.475 1.099,44.326 1.112,44.326 1.326,44.112 1.326,41.955 1.411,41.87 1.411,41.861 1.716,41.556 1.725,41.556 2.124,41.157 v1(2.457,41.157)
  Layer 2 w0.102: v1(2.457,41.157) 2.518,41.157 2.706,40.969 8.032,40.969 8.291,40.71 11.34,40.71 J5.2@11.475,40.575
USB_D_N: L4.3 U1.25 U7.4 | length 41.4
  Top/Sig1 w0.191: U1.25@-7.8,43.3 -7.013,43.3 -6.823,43.11 v1(-6.785,43.11) ; v1(5.437,25.673) 5.437,25.636 5.357,25.556 5.357,24.365 5.452,24.27 5.452,23.739 5.564,23.628 6.069,23.628 6.18,23.516 6.18,23.426 6.36,23.246 U7.4@6.485,23.246 6.315,23.076 5.834,23.076 v1(5.807,23.05) ; v1@6.816,15.163 v1(6.816,15.125) 6.789,15.098 6.789,14.993 6.746,14.95 6.746,14.775 6.743,14.772 6.743,14.591 6.855,14.48 6.895,14.48 7,14.375 L4.3@7,14.2
  Layer 2 w0.191: v1(-6.785,43.11) -6.785,43.073 -6.715,43.003 -6.715,42.942 -6.323,42.549 -6.323,42.523 -5.967,42.167 -3.618,42.167 0.614,37.935 1.153,37.935 1.161,37.926 3.732,37.926 5.05,36.608 5.05,30.729 6.173,29.606 6.173,27.332 5.421,26.58 5.421,25.689 v1(5.437,25.673) ; v1(5.807,23.05) 5.781,23.023 5.581,23.023 5.401,22.842 5.401,21.012 6.746,19.667 6.746,15.233 6.816,15.163 v1(6.816,15.125)
USB_D_P: L4.4 U1.26 U7.3 | length 40.9
  Top/Sig1 w0.191: U1.26@-7.8,42.9 -7.798,42.898 -7.222,42.898 -7.128,42.805 v1(-7.091,42.805) ; U7.3@3.985,23.246 4.11,23.246 4.528,23.664 5.048,23.664 5.16,23.776 5.16,24.149 5.065,24.244 5.065,25.628 4.99,25.703 v1(4.99,25.741) ; U7.3@4.047,23.184 4.165,23.067 4.521,23.067 4.562,23.025 v1(4.6,23.025) ; L4.4@6.2,14.186 6.2,14.361 6.305,14.465 6.339,14.465 6.451,14.577 6.451,14.893 6.454,14.896 6.454,14.95 6.411,14.993 6.411,15.098 v1(6.384,15.125) v1@6.384,15.163
  Layer 2 w0.191: v1(-7.091,42.805) -7.053,42.805 -6.983,42.735 -6.922,42.735 -6.615,42.428 -6.615,42.402 -6.088,41.875 -3.739,41.875 0.493,37.642 1.032,37.642 1.04,37.634 3.611,37.634 4.758,36.487 4.758,30.608 5.881,29.485 5.881,27.453 5.129,26.701 5.129,25.918 4.99,25.779 v1(4.99,25.741) ; v1(4.6,23.025) 4.627,22.998 4.941,22.998 5.109,22.831 5.109,20.891 6.454,19.546 6.454,15.233 6.384,15.163 v1(6.384,15.125)
USB_DE_N: J2.A7 J2.B7 L4.2 | length 11.6
  Top/Sig1 w0.191: v1(6.825,11.666) 6.852,11.693 6.852,12.027 7,12.175 L4.2@7,12.35
  Bottom Layer w0.191: J2.A7@-0.25,9.8 -0.195,9.745 -0.195,8.995 -0.05,8.85 0.575,8.85 0.75,9.025 J2.B7@0.75,9.8 0.75,10.25 0.646,10.354 0.646,10.721 1.1,11.175 4.005,11.175 4.474,10.706 6.317,10.706 6.755,11.145 6.755,11.559 6.825,11.629 v1(6.825,11.666)
USB_DE_P: J2.A6 J2.B6 L4.1 | length 10.8
  Top/Sig1 w0.191: L4.1@6.2,12.336 6.2,12.161 6.366,11.994 6.366,11.693 v1(6.393,11.666)
  Bottom Layer w0.191: J2.B6@-0.75,9.8 -0.75,10.25 -0.597,10.403 -0.597,10.482 -0.482,10.597 0.003,10.597 0.097,10.503 0.097,10.403 J2.A6@0.25,10.25 ; J2.A6@0.25,9.8 J2.A6@0.25,10.25 ; v1(6.393,11.666) 6.393,11.629 6.463,11.559 6.463,11.266 6.196,10.999 4.595,10.999 4.126,11.467 0.979,11.467 0.354,10.842 0.354,10.354 J2.A6@0.25,10.25
USB_DET: R20.1 U1.24 U3.6 | length 27.5
  Top/Sig1 w0.102: R20.1@-8.922,43.457 -8.368,43.457 -8.125,43.7 U1.24@-7.8,43.7 -7.138,43.7 -6.994,43.845 v1(-6.95,43.845) ; v1(5.827,30.463) 5.8,30.437 5.8,29.181 6.161,28.82 6.161,28.11 6.047,27.996 U3.6@5.835,27.996
  Layer 2 w0.102: v1(-6.95,43.845) -6.907,43.802 -6.65,43.802 -5.559,42.711 -2.986,42.711 1.178,38.547 4.691,38.547 5.387,37.85 5.387,31.581 5.305,31.499 5.305,30.985 v1(5.827,30.463)
USER_BUT_A: C45.2 D6.2 FET1.1 R32.2 S3.1 U8.11 | length 56
  Top/Sig1 w0.102: R32.2@-8.9,34.525 -8.875,34.525 -8.302,35.098 -7.912,35.098 -7.745,35.265 -7.745,35.283 -7.577,35.45 FET1.1@-7.3,35.45 -6.975,35.45 -6.957,35.432 -6.593,35.432 v1(-6.275,35.75) ; v1(2.368,33.838) 2.368,33.811 2.652,33.527 2.652,33.455 2.658,33.45 2.658,32.554 2.843,32.368 2.847,32.368 2.972,32.243 5.734,32.243 6.143,31.834 6.143,30.575 6.145,30.573 6.145,30.218 6.143,30.217 6.143,29.773 6.496,29.421 U8.11@6.896,29.421 7.287,29.421 7.747,28.961 7.747,28.863 7.917,28.694 v1(7.917,28.632) ; D6.2@2.4,5.89 v1(2.4,6.5) ; v1(7.2,22.7) 9.098,22.7 v1(9.123,22.725)
  Top/Sig1 w0.254: S3.1@0,4.475 1.651,4.475 C45.2@2.177,5.001 ; C45.2@2.4,5.105 D6.2@2.4,5.89
  Layer 2 w0.102: v1(-6.275,35.75) -5.975,35.45 -5.482,35.45 -5.132,35.8 0.307,35.8 2.084,34.023 2.12,34.023 2.306,33.838 v1(2.368,33.838) ; v1(2.4,6.5) 2.147,6.753 2.147,9.747 3.6,11.2 3.6,20.6 4.283,21.283 4.283,23.401 4.606,23.724 6.176,23.724 v1(7.2,22.7) ; v1(7.917,28.632) 7.925,28.632 7.996,28.561 7.996,28.398 8.229,28.164 8.229,24.866 8.744,24.351 8.744,23.104 v1(9.123,22.725)
USER_BUT_A_OUT: FET2.3 R17.2 U1.45 | length 13.3
  Top/Sig1 w0.102: FET2.3@-5.9,35.45 -5.9,35.525 -5.7,35.725 v1(-5.7,35.775) ; U1.45@-1,42.9 -0.675,42.9 -0.399,42.624 -0.174,42.624 -0.025,42.475 R17.2@-0.025,42.45 -0.025,42.425 0.275,42.125 v1(0.275,42.025)
  Layer 2 w0.102: v1(-5.7,35.775) -5.428,36.047 -1.228,36.047 -0.825,36.45 v1(-0.825,37.6)
  Bottom Layer w0.102: v1(-0.825,37.6) -0.15,38.275 -0.15,41.6 v1(0.275,42.025)
USER_BUT_D: D5.2 R14.1 S2.1 U1.44 | length 39.5
  Top/Sig1 w0.102: U1.44@-1,42.5 -0.675,42.5 -0.402,42.227 -0.402,41.952 -0.149,41.699 -0.124,41.699 0.025,41.55 R14.1@0.025,41.525 ; R14.1@0.025,41.5 0.281,41.244 0.369,41.244 v1(0.412,41.2) ; D5.2@9.4,18 v1(9.4,18.8)
  Top/Sig1 w0.254: S2.1@9.15,10.875 9.15,11.15 9.523,11.523 9.604,11.523 9.752,11.672 9.752,13.477 9.775,13.5 9.775,15.225 9.15,15.85 S2.1@9.15,16.125 9.4,16.375 D5.2@9.4,18
  Layer 2 w0.102: v1(0.412,41.2) 0.425,41.187 0.425,40.575 1.441,39.559 2.266,39.559 2.303,39.522 4.778,39.522 8.151,36.149 8.151,32.249 7.971,32.069 7.971,30.735 7.244,30.008 7.244,28.353 7.671,27.926 7.671,24.551 8.143,24.079 8.143,21.526 9.4,20.269 v1(9.4,18.8)
USER_BUT_T: D4.2 R13.1 S1.1 U1.43 | length 23.9
  Top/Sig1 w0.102: U1.43@-1,42.1 -0.702,42.1 -0.656,42.055 -0.656,41.919 -0.359,41.621 -0.359,41.112 -0.124,40.877 -0.124,40.824 R13.1@0.025,40.675 0.025,40.65 0.174,40.501 0.199,40.501 0.459,40.241 1.221,40.241 1.302,40.322 1.53,40.322 v1(1.573,40.366) ; v1(9.125,45.3) 9.125,45.945 D4.2@9.18,46
  Top/Sig1 w0.254: S1.1@9.15,48.15 9.998,48.998 9.998,52.002 S1.1@9.15,52.85 ; D4.2@9.18,46 S1.1@9.18,47.845
  Layer 2 w0.102: 1.529,40.584 1.529,42.678 1.776,42.925 4.075,42.925 5.9,44.75 5.9,45.65 6.275,46.025 8.4,46.025 v1(9.125,45.3) ; 1.53,40.583 1.53,40.41 v1(1.573,40.366)
VBAT: C23.2 C24.2 C27.2 C32.2 C33.2 C34.2 FB3.1 L2.1 R22.1 R34.1 U2.E4 U4.B3 U5.A2 U5.C1 U5.D1 U5.D2 U6.3 U6.4 | length 48.7
  Top/Sig1 w0.102: -8.458,24.618 -6.618,24.618 ; v1(-7.509,30.767) -7.509,30.796 -7.421,30.884 -7.416,30.884 -7.357,30.944 -7.357,31.143 U5.D2@-6.9,31.6 U5.D1@-6.9,32 U5.C1@-6.5,32 ; U6.4@-3.673,34.579 -3.676,34.579 -3.726,34.629 -3.726,34.632 -3.85,34.756 -3.85,35.047 -3.672,35.225 U6.3@-3.62,35.225 ; R22.1@-3.425,25.6 -3.425,25.625 -3.749,25.949 -3.762,25.949 -3.825,26.012 -3.825,26.275 U2.E4@-3.4,26.7 ; 1.15,22.375 1.342,22.183 5.55,22.183 5.697,22.33 9.177,22.33 9.441,22.593 9.441,22.857 8.925,23.372 8.722,23.575 R34.1@8.722,23.875
  Top/Sig1 w0.254: FB3.1@-6.215,23.5 -6.215,24.215 -6.618,24.618 -6.742,24.742 -8.458,24.742 -8.458,27.242 -7.63,28.07 C32.2@-7.63,30.625 -7.63,32.18 -8.146,32.696 -8.57,32.696 -8.704,32.83 -8.704,33.667 -8.446,33.924 -8.446,34.252 -7.88,34.818 -5.32,34.818 -5.08,34.578 -4.633,34.578 C34.2@-4.5,34.445 -4.367,34.578 -4.169,34.578 -4.168,34.579 U6.4@-3.676,34.579 ; U5.A2@-5.69,31.59 -5.69,30.927 -5.689,30.778 -5.656,30.745 C33.2@-5.616,30.745 v1(-5.659,30.745) ; C23.2@-3.425,23.375 -3.425,22.875 -2.925,22.375 1.15,22.375 1.455,22.68 C27.2@1.455,24.1 1.455,24.945 1.2,25.2 L2.1@1.2,25.7 1.2,26.2 0.6,26.8 U4.B3@0.6,27.1 ; C23.2@-3.425,23.5 R22.1@-3.425,25.6
  other v1: -7.718,30.453 -5.371,30.949
VBAT_EXT: FB3.2 pad.0@-5.907,4.038
  other v1: -7.107,22.473 -7.801,22.484 -7.441,22.491 -7.646,22.78 -7.262,22.785
VBAT_SEN_ENN: C46.1 R36.2 U8.13 | length 6.2
  Top/Sig1 w0.102: U8.13@6.896,30.721 8.016,30.721 8.083,30.788 8.267,30.788 8.59,30.465 8.59,30.29 8.726,30.155 8.726,27.875 8.9,27.701 8.9,26.528 8.896,26.524 8.896,26.499 8.747,26.35 R36.2@8.722,26.35
VBAT_VSEN: C46.2 R34.2 R36.1 U8.12 | length 7
  Top/Sig1 w0.102: U8.12@6.896,30.071 8.024,30.071 C46.2@8.15,29.945 8.2,29.945 8.409,29.736 8.409,29.686 8.523,29.572 8.523,27.777 8.697,27.603 8.697,27.112 8.345,26.76 8.345,25.831 8.548,25.628 8.548,25.599 8.697,25.45 R36.1@8.722,25.45 ; R34.2@8.726,24.779 R36.1@8.726,25.45
VDD_3V3: C6.1 C10.1 C11.1 C12.1 C13.1 C14.2 C15.2 C16.1 C21.2 C22.2 C30.2 C31.2 C35.2 C37.1 FB1.2 J1.2 J3.11 J5.1 L3.1 R4.1 R7.2 R8.2 R9.2 R10.2 R11.1 R12.2 R13.2 R14.2 R17.1 R20.2 U1.20 U1.46 U1.55 U1.56 U3.12 U5.C2 | length 114.6
  Top/Sig1 w0.102: R12.2@-9.875,48.75 -9.875,48.775 -9.726,48.924 -9.701,48.924 -9.425,49.2 v1(-8.5,49.2) ; R20.2@-9.822,43.457 v1(-9.807,43.457) ; v1(-6.613,31.238) -6.613,31.3 -6.523,31.39 -6.523,31.577 U5.C2@-6.5,31.6 ; -2.437,31.992 -2.269,32.16 -2.113,32.16 v1@-1.963,32.31 ; C31.2@-1.2,31.755 C31.2@-1.1,31.655 ; R7.2@-0.925,34.525 v1(-0.925,34.962) R8.2@-0.925,35.4 ; C37.1@-0.045,43.795 -0.005,43.795 0.104,43.905 0.104,44 0.212,44.108 0.738,44.108 0.925,43.921 R17.1@0.925,42.375 ; R17.1@0.925,42.35 R14.2@0.925,41.525 R13.2@0.925,40.675 0.948,40.698 v1(1.212,40.698) ; v1(1.025,48.25) R10.2@1.052,48.25 ; R10.2@1.052,48.277 R9.2@1.052,49.064
  Top/Sig1 w0.203: v1(-8.7,45.3) U1.20@-7.8,45.3 ; U1.46@-0.677,43.298 -0.669,43.291 -0.637,43.291 -0.463,43.117 -0.073,43.117 -0.046,43.144 C37.1@-0.046,43.667 ; v1(-0.058,43.653) -0.051,43.66 -0.051,43.789 C37.1@-0.045,43.795 ; v1(2.685,26.741) 2.702,26.759 3.517,26.759 C22.2@3.535,26.776 3.909,26.776 3.929,26.796 U3.12@4.435,26.796
  Top/Sig1 w0.254: R4.1@-9.875,46.9 -9.85,46.9 -9.777,46.827 -9.777,46.802 -9.65,46.675 -9.65,46.15 -9.292,45.792 -9.029,45.792 -8.773,45.536 -8.773,45.333 -8.74,45.3 v1(-8.7,45.3) ; FB1.2@-3.566,51.973 FB1.2@-3.558,51.965 ; L3.1@-3.175,32.146 -2.591,32.146 -2.437,31.992 -2.283,31.838 -2.283,31.788 -2.15,31.655 C30.2@-2.1,31.655 C31.2@-1.1,31.655 ; C35.2@-1.64,10.05 -1.64,10.685 -1.25,11.075 J3.11@-1.25,11.712 v1(-1.25,12.6) ; v1(8.925,55.075) 8.975,55.125 C15.2@9.945,55.125
  Top/Sig1 w0.33: C15.2@9.945,55.125 10.04,55.03 10.04,54.46 v1(10.05,54.45)
  Layer 2 w0.102: v1@-6.609,31.242 -6.609,32.636 -6.181,33.064 -5.697,33.064 -5.184,32.55 -2.229,32.55 ; -1.876,32.571 -1.84,32.536 ; v1(-0.925,34.962) 0.444,34.962 v1(0.461,34.946) v1@0.507,34.9 ; v1(1.025,48.25) 1.457,48.25 1.91,47.796 1.91,47.392 1.826,47.308 1.826,47.068 v1(1.783,47.024) 1.788,47.018 1.788,46.692 v1(1.794,46.686)
  Bottom Layer w0.102: v1(-9.807,43.457) -8.332,43.457 -8.3,43.425
  Bottom Layer w0.381: -5.38,51.375 -7.025,51.375 v1(-7.9,50.5) -7.9,50.218 -8.3,49.818 -8.3,43.425 -8.3,35.1 -7.4,34.2 -3.879,34.2 v1@-2.44,32.76 ; -2.1,32.795 -2.042,32.738 ; -1.876,32.571 -1.876,31.78 -1.643,31.547 -1.643,27.702 -1.7,27.645 -1.7,23.8 -0.6,22.7 -0.6,13.9 -1.25,13.25 v1(-1.25,12.6) ; -1.876,32.678 0.322,32.678 2,31 2,27.426 v1(2.685,26.741) ; 0.8,35.3 3.9,38.4 3.9,54 4.975,55.075 v1(8.925,55.075) ; v1(1.794,46.686) 1.794,46.625 v1@1.807,46.611
  other v1: -2.229,32.35 -1.876,32.371 -2.3,32.7 -5.547,51.473 -5.139,51.471 -4.798,51.471 -5.356,51.743 -4.972,51.762
VDDP_3V3: C7.2 C8.1 FB1.1 L7.2
VLED: C28.2 D1.2 J3.16 U4.D2 | length 19.2
  Top/Sig1 w0.102: v1(-0.606,27.25) -0.562,27.294 -0.406,27.294 U4.D2@-0.2,27.5
  Top/Sig1 w0.203: D1.2@-1.7,23.87 -1.586,23.756 -1.099,23.756 -0.746,23.403 -0.558,23.403 C28.2@-0.4,23.245 -0.396,23.249 v1(-0.396,23.273)
  Top/Sig1 w0.254: J3.16@-3.75,11.712 v1(-3.75,12.575)
  Layer 2 w0.102: v1(-0.606,27.25) -0.606,25.531 -0.679,25.458 -0.679,23.556 v1(-0.396,23.273)
  Layer 2 w0.254: v1(-3.75,12.575) -3.75,12.596 -3.603,12.743 -3.603,13.497 -2.031,15.069 -2.031,21.519 -0.411,23.138 -0.411,23.258 v1(-0.396,23.273)
VSTB_3V3: C38.2 C41.2 FET1.2 J5.10 R15.2 R25.2 R29.1 R31.1 R32.1 U6.1 U8.4 | length 45
  Top/Sig1 w0.102: R32.1@-8.9,35.425 -8.125,35.425 FET1.2@-8.1,35.45 -8.1,35.525 -8.026,35.599 -7.951,35.599 -7.675,35.875 -7.184,35.875 -7.103,35.794 -6.869,35.794 v1(-6.825,35.75) ; R31.1@-2.85,33.7 -2.85,33.725 -2.339,34.236 -2.209,34.236 C38.2@-2,34.445
  Top/Sig1 w0.254: U6.1@-2.727,34.562 -2.117,34.562 C38.2@-2,34.445 ; v1(-1.95,34.445) -1.659,34.154 -1.655,34.154 -1.49,33.989 -1.2,33.989 ; R29.1@-1.1,33.55 -1.125,33.55 -1.198,33.623 -1.198,33.987 -1.2,33.989 ; U8.4@1.196,33.321 1.168,33.349 0.391,33.349 0.14,33.6 C41.2@0.1,33.6 0.06,33.6 0.027,33.633 0.027,33.836 -0.125,33.989 -1.2,33.989 ; v1(7.833,32.419) 7.841,32.426 8.379,32.426 8.448,32.495 v1(8.468,32.495)
  Layer 2 w0.102: v1(-6.825,35.75) -5.521,34.445 v1(-1.95,34.445)
  Layer 2 w0.254: v1(-1.95,34.445) 0.28,34.445 1.281,33.444 2.531,33.444 3.171,34.084 3.171,35.021 3.384,35.234 3.384,35.305 v1(3.825,35.746) ; v1(7.375,35.825) 7.833,35.367 v1(7.833,32.419) ; v1(8.468,32.495) 8.454,32.48 8.454,32.157 8.25,31.953 8.25,30.435 7.523,29.709 7.523,28.469 7.95,28.042 7.95,24.75 8.461,24.239 8.461,21.719 8.822,21.358 9.179,21 10.271,21 11.016,20.255 J5.10@11.475,20.255
  Bottom Layer w0.254: v1(3.825,35.746) 4.524,35.746 4.595,35.675 5.273,35.675 5.675,36.077 7.103,36.077 7.354,35.825 v1(7.375,35.825)
VSUB_VSEN: C43.2 R30.2 R35.1 U8.9 | length 3.7
  Top/Sig1 w0.102: R35.1@-2.3,29.85 -0.55,29.85 C43.2@-0.5,29.9 ; C43.2@-0.545,29.9 -0.545,30.071 U8.9@1.196,30.071
VUSB: C18.2 C19.2 FB2.1 R16.1 R30.1 U2.A1 U2.A2 | length 35.5
  Top/Sig1 w0.102: R16.1@7.525,27.296 7.525,27.271 7.925,26.872 7.925,24.125 v1(7.7,23.9)
  Top/Sig1 w0.254: v1(-4.72,29.765) -4.705,29.779 C18.2@-4.705,29.8 ; C19.2@-4.71,29 -4.67,29 -4.637,28.967 -4.637,28.459 -4.6,28.422 U2.A1@-4.6,28.3 U2.A2@-4.2,28.3 ; v1(-4.704,29.428) C18.2@-4.705,29.8 ; C19.2@-4.704,29.006 v1(-4.704,29.428)
  Layer 2 w0.381: v1(-4.72,29.765) -4.668,29.816 -1.916,29.816 v1@-1.118,29.018 ; v1(-1.186,28.95) -0.777,28.541 1.659,28.541 2.25,27.95 2.25,25.876 2.473,25.652 3.848,25.652 4.4,25.1 5.8,25.1 6.7,24.2 6.7,24.1 7.5,24.1 v1(7.7,23.9) 7.8,23.8 7.8,11.4 7.4,11 7.4,10.684 7.466,10.618 v1(7.466,10.479)
  other v1: 7.086,9.755 7.515,9.775 7.293,10.118 7.083,10.472 -4.705,29.061 -5,29.223 -5.009,29.557
pads on no net: ANT1.3 ANT1.4 ANT1.5 J1.19 J1.20 J2.0 J2.A8 J2.B8 J3.0 J3.2 J3.3 J3.4 J3.5 J3.6 S1.MH1 S1.MH2 S2.MH1 S2.MH2 S4.MH1 S4.MH2 U1.28 U1.29 U1.30 U1.31 U1.32 U1.33 U1.34 U1.35 U1.38 U1.39 U1.40 U1.41 U1.42 U1.53 U1.54 U2.A3 U2.E2 U2.E3 U3.9 U4.A1 U4.C1 U4.D1 U7.5

## Polygon pours and split planes (outlines as drawn)
GND on Bottom Layer "NONET_L-01_P-001" (solid, remove dead copper, pour order 19): 14.325,63.825 -12.55,64.025 -14.125,62.45 -14.125,2.425 -12.325,0.625 10.15,0.625 14.5,4.975
NetFB2_2 on Bottom Layer "NONET_L-01_P-001" (solid, remove dead copper, pour order 18): -2.695,10.026 -2.695,8.195 -1.975,7.475 1.5,7.475 2.35,6.625 5.65,6.625 6.425,7.4 6.425,9.675 6.3,9.8 5.375,9.8 5.25,9.675 5.25,7.85 4.975,7.575 4.05,7.575 2.694,8.931 2.694,9.55 2.25,9.55 2.102,9.698 2.102,9.002 1.675,8.575 -1.668,8.575 -2.103,9.01 -2.103,9.573
VDD_3V3 on Bottom Layer "NONET_L-01_P-001" (solid, remove dead copper, pour order 14): 1.446,46.222 1.446,44.496 0.825,43.875 0.825,41.125 0.6,40.9 0.6,38.3 -1.7,36 -1.7,34.1 -1.876,33.924 -1.876,33.749 -2.1,33.525 -2.825,33.525 -1.978,32.678 -0.216,32.678 0.294,33.188 -0.318,33.8 -0.675,33.8 -0.9,34.025 -0.9,34.625 -0.55,34.975 -0.55,35.925 1.3,37.775 1.3,40.45 1.6,40.75 1.6,43.6 2.325,44.325 2.325,47.046 2.191,47.18 2.081,47.07
VDD_3V3 on Bottom Layer "NONET_L-01_P-001" (solid, remove dead copper, pour order 6): -1.3,31.6 -1.3,32 -1,32.3 0.1,32.3 1.7,30.7 1.7,27.3 2.6,26.4 2.8,26.4 3,26.6 3,26.8 2.3,27.5 2.3,31.4 0.8,32.9 -0.8,32.9 -1,33.1 -1,33.2 -0.8,33.4 -0.9,33.5 -1.5,33.5 -1.7,33.3
VDD_3V3 on Bottom Layer "NONET_L-01_P-001" (solid, remove dead copper, pour order 5): -2.7,32.3 -1.9,31.5 -1.9,23.4 -1,22.5 -1,13.9 -1.5,13.4 -1.5,12.5 -1.4,12.4 -1.126,12.4 -0.941,12.585 -0.941,13.259 -0.4,13.8 -0.4,22.9 -1.3,23.8 -1.3,32.3 -1.1,32.5 -1.36,32.76 -2.44,32.76
GND on Top/Sig1 "NONET_L-01_P-001" (solid, remove dead copper, pour order 15): 12.425,63.95 -11.275,63.95 -13.6,61.625 -13.6,2.3 -12.4,1.1 10.175,1.1 14.725,5.65 14.725,62.3 12.925,64.1
VBAT on Top/Sig1 "NONET_L-01_P-001" (solid, remove dead copper, pour order 1): -7.683,31.257 -7.843,31.257 -8,31.1 -8,28.16 -8.721,27.439 -8.721,24.593 -8.524,24.397 -7.027,24.397 -6.407,23.777 -5.85,23.777 -5.85,24.35 -6.383,24.883 -7.946,24.883 -8.261,25.199 -8.261,26.997 -7.336,28.192 -7.3,31.115 -7.444,31.258